# Altium PCB Logic_Controller_REV1.PcbDoc (part 1 of 2)
Units mm, origin at the board's own origin, x right, y up, seen from the top; angles counter-clockwise.
Board outline 67.13 x 101.6 mm, 4 copper layers (Top Layer, GND, PWR, Bottom Layer), stack 1.586 mm thick; 118 components, 76 nets, 360 pads, 221 vias.
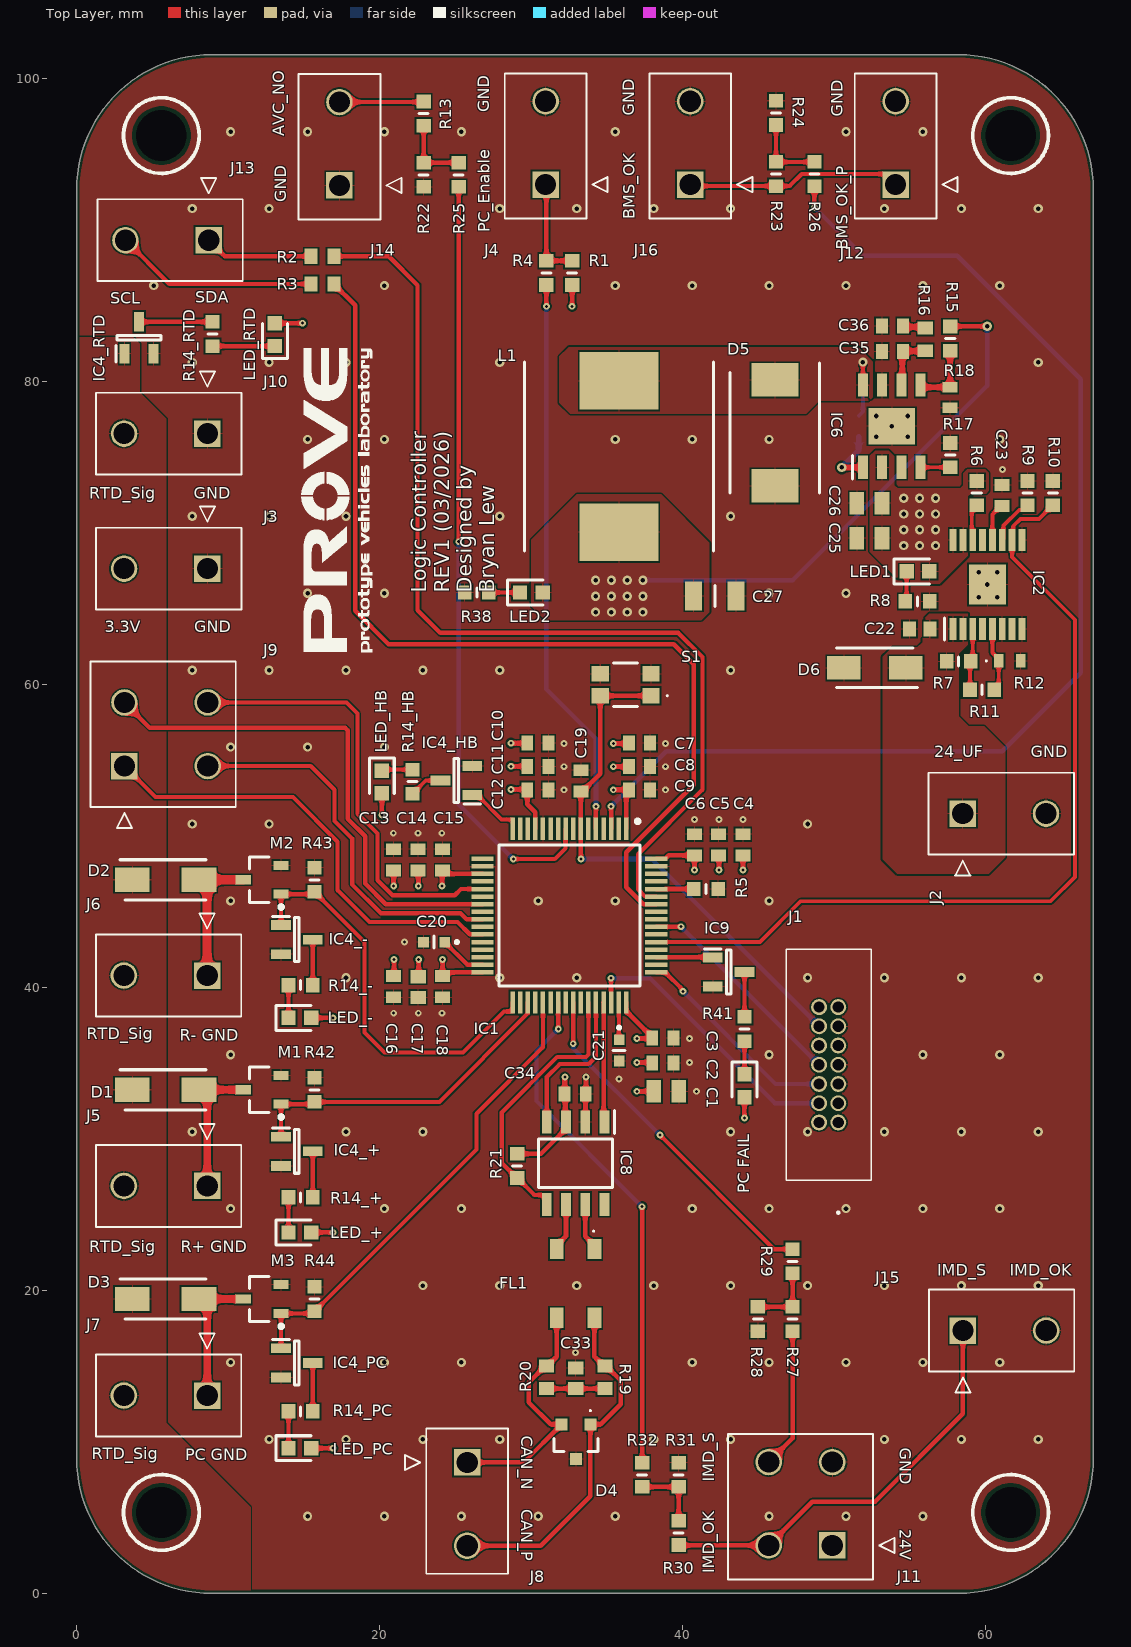
[diagram p0: Top Layer view]
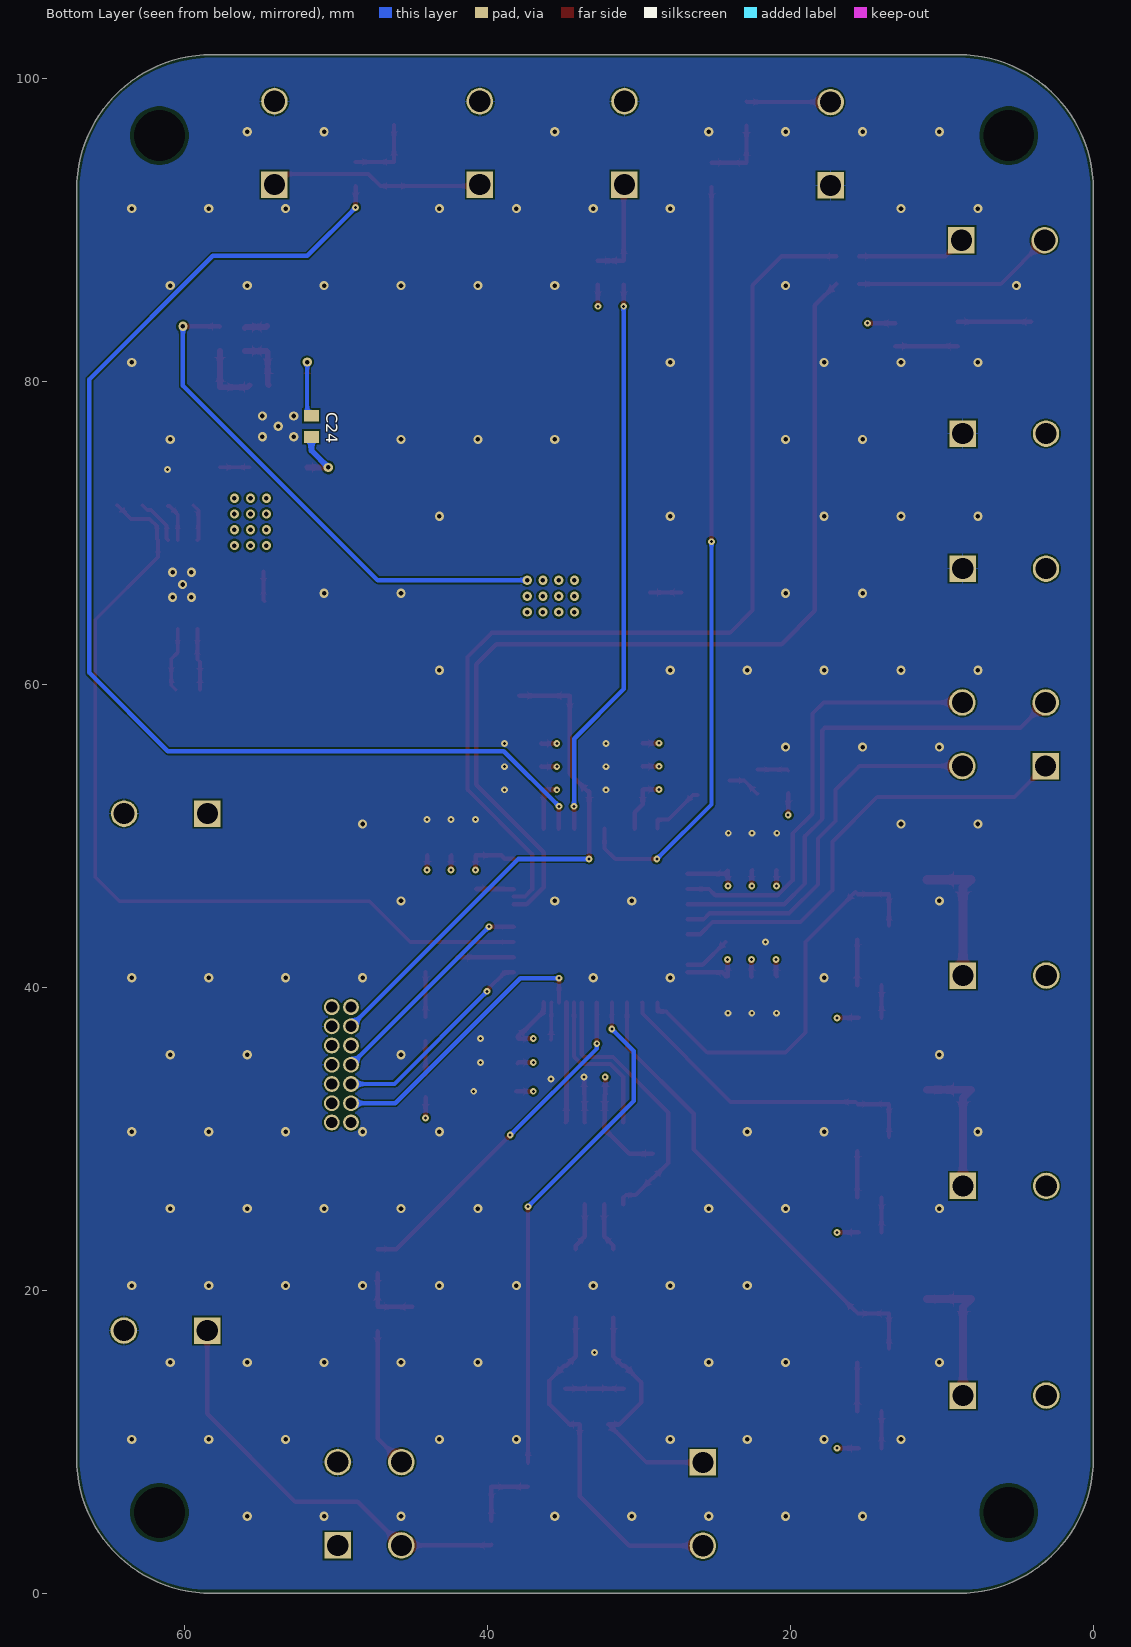
[diagram p1: Bottom Layer view, seen from below]
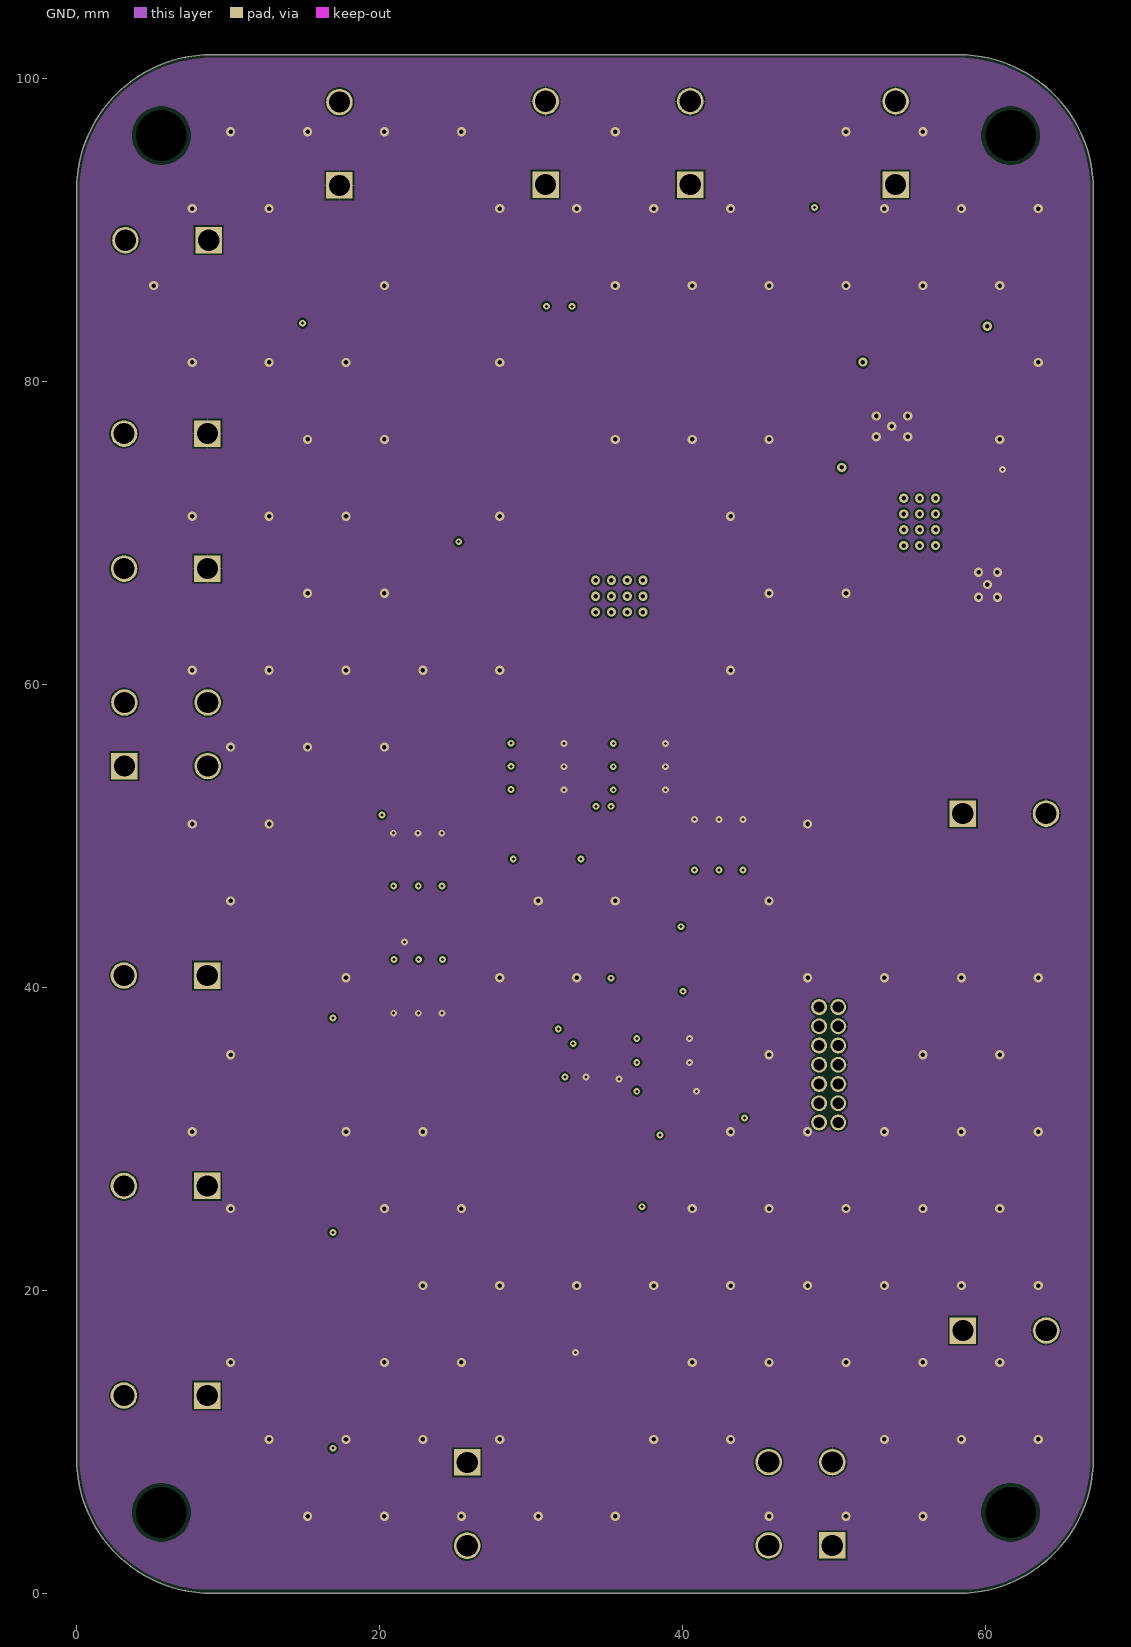
[diagram p2: GND]
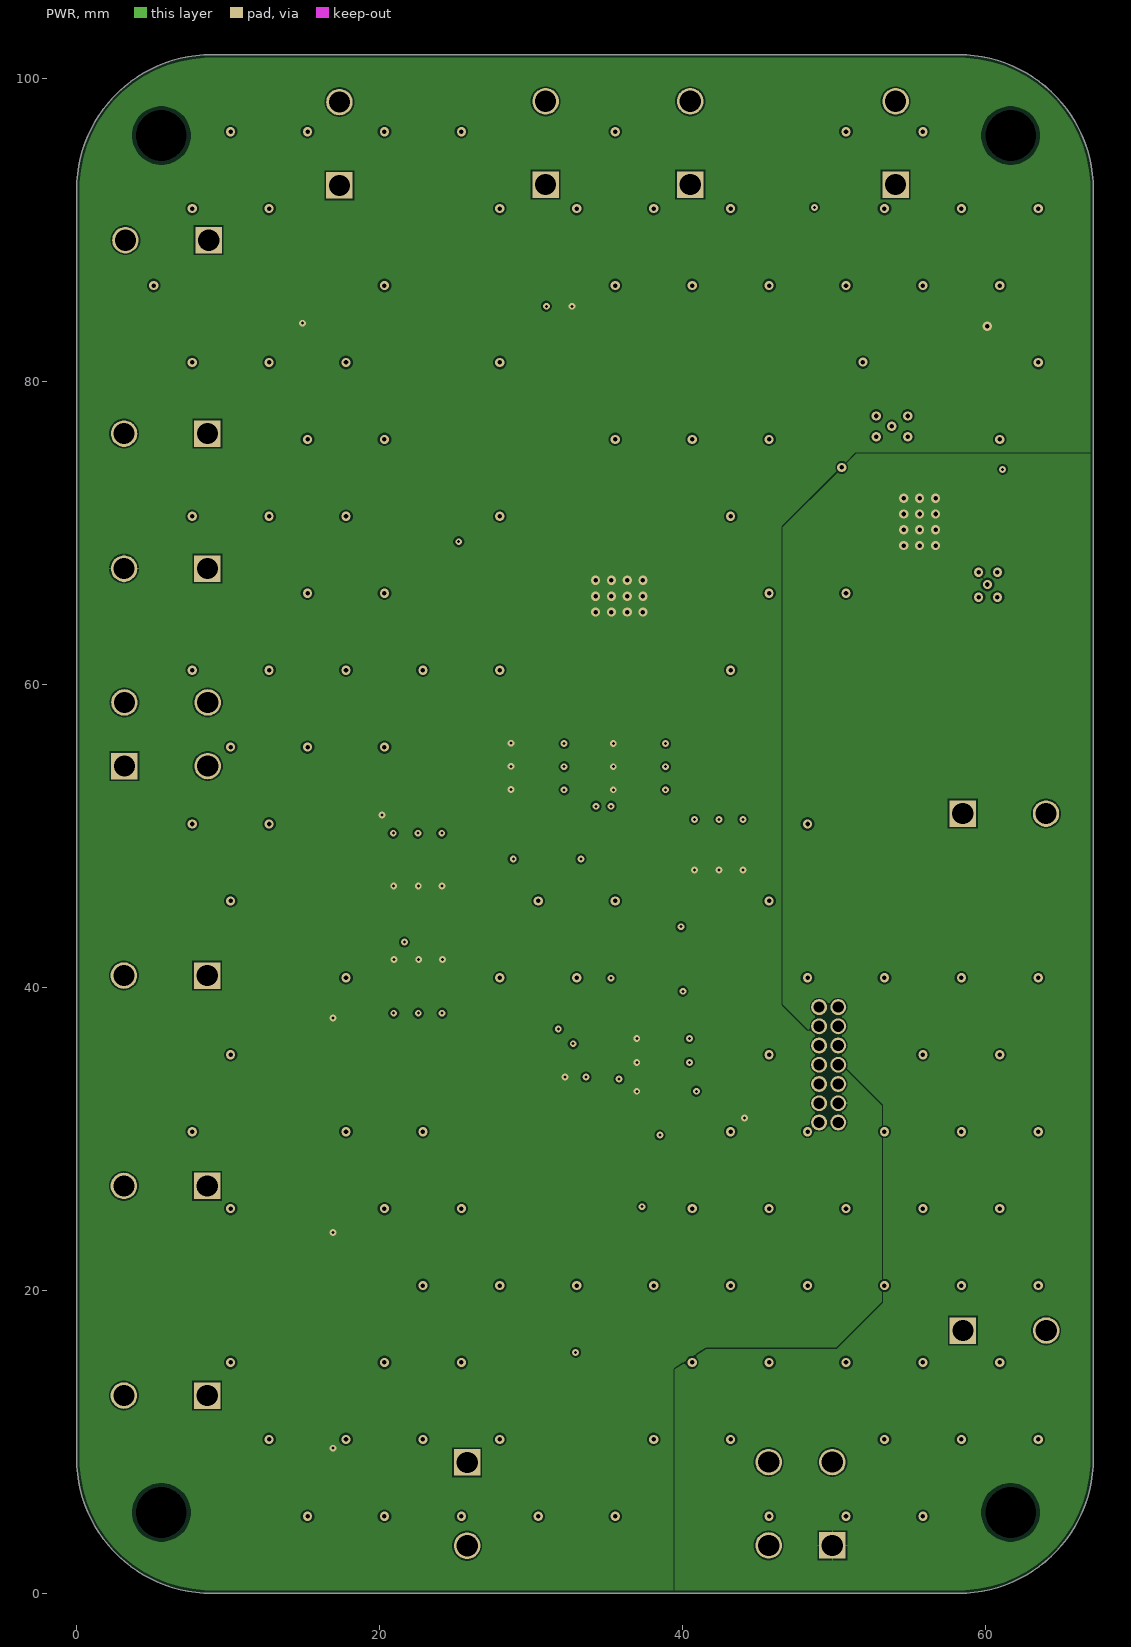
[diagram p3: PWR]
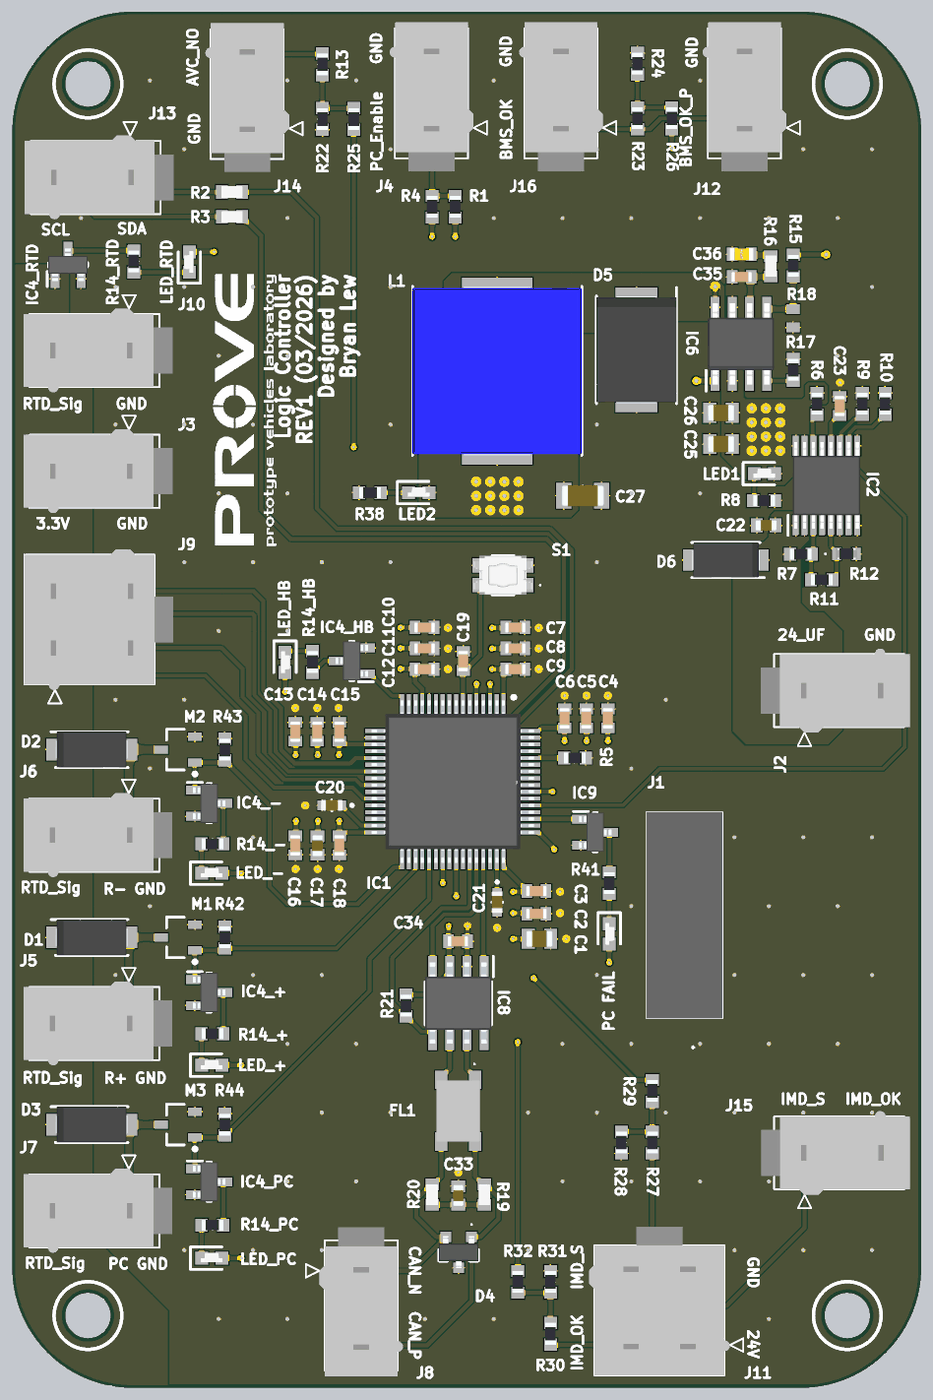
[diagram p4: 3D render of the assembled board from above, using the file's embedded part models]

## Layer stack, top to bottom
Top Solder: solder mask 0.0102, Solder Resist, Dk 3.5
Top Layer: signal copper 0.035
Dielectric 2: prepreg 0.2104, PP-006, Dk 4.1
GND: signal copper 0.0152
Dielectric 1: dielectric 1.065, FR-4, Dk 4.3
PWR: signal copper 0.0152
Dielectric 3: prepreg 0.2104, PP-006, Dk 4.1
Bottom Layer: signal copper 0.035
Bottom Solder: solder mask 0.0102, Solder Resist, Dk 3.5

## Board outline
0,8.89 0,92.71 cw(c8.89,92.71) 8.89,101.6 58.242,101.6 cw(c58.242,92.71) 67.132,92.71 67.132,8.89 cw(c58.242,8.89) 58.242,0 8.89,0 cw(c8.89,8.89)

## Design rules (kind name [scope] priority, off if disabled: settings)
BoardOutlineClearance [All] p1: gap=0.2 ignorepadtopadclearanceinfootprint=FALSE
Clearance [All] p1: gap=0.102 ignorepadtopadclearanceinfootprint=FALSE except(0.127: Arc-Via Track-Via SMDPad-Via THPad-Via Via-Via Via-Fill Via-Poly Via-Region Via-Text; 0.15: Arc-Arc Arc-Track Track-Track; 0.25: Arc-Hole Track-Hole SMDPad-Hole THPad-Hole Via-Hole Fill-Hole Poly-Hole Region-Hole Text-Hole)
ComponentClearance [All] p1: gap=0.102 collisioncheckmode=3 verticalgap=0.102 showdistances=TRUE
DiffPairsRouting [All] p1: maxlimit=0.102 minlimit=0.102 mostfreqgap=0.102 toplayer_minwidth=0.102 toplayer_maxwidth=1816.048 toplayer_prefwidth=0.102 midlayer1_minwidth=0.102 midlayer1_maxwidth=1816.048 midlayer1_prefwidth=0.102 midlayer2_minwidth=0.102 midlayer2_maxwidth=1816.048 midlayer2_prefwidth=0.102 bottomlayer_minwidth=0.102 bottomlayer_maxwidth=1816.048 bottomlayer_prefwidth=0.102 maxuncoupledlength=12.7
Height [All] p1: minheight=0 maxheight=1816.048 prefheight=12.7
HoleSize [All] p1: absolutevalues=TRUE maxlimit=6.3 minlimit=0.2 maxpercent=80.000 minpercent=20.000
HoleToHoleClearance [All] p1: gap=0.25 allowstackedmicrovias=FALSE
MinimumAnnularRing [All] p1: minimumring=0.076
MinimumSolderMaskSliver [All] p1: minsoldermaskwidth=0
PlaneClearance [All] p1: clearance=0.102
PlaneConnect PlaneConnectPowerPads [InPadClass('PowerPads')] p1: planeconnectstyle=Direct reliefexpansion=0.508 reliefentries=4 reliefconductorwidth=0.254 reliefairgap=0.254
PlaneConnect [All] p2: pad.planeconnectstyle=Relief pad.reliefexpansion=0.3 pad.reliefentries=4 pad.reliefconductorwidth=0.102 pad.reliefairgap=0.102 via.planeconnectstyle=Direct via.reliefexpansion=0.3 via.reliefentries=4 via.reliefconductorwidth=0.127 via.reliefairgap=0.127
PolygonConnect PolygonConnectPowerPads [All vs (InPadClass('PowerPads'))] p1: connectstyle=Direct reliefconductorwidth=0.254 reliefentries=4 polygonreliefangle="90 Angle" airgapwidth=0.254
PolygonConnect [All] p2: thpad.connectstyle=Relief thpad.reliefconductorwidth=0.102 thpad.reliefentries=4 thpad.polygonreliefangle="90 Angle" thpad.airgapwidth=0.102 smdpad.connectstyle=Relief smdpad.reliefconductorwidth=0.102 smdpad.reliefentries=4 smdpad.polygonreliefangle="90 Angle" smdpad.airgapwidth=0.102 via.connectstyle=Direct via.reliefconductorwidth=0.127 via.reliefentries=4 via.polygonreliefangle="90 Angle" via.airgapwidth=0.127
RoutingVias [All] p1: holewidth=0.2 width=0.45 viastyle="Through Hole" minholewidth=0.2 minwidth=0.45 maxholewidth=6.3 maxwidth=6.55
SilkToSilkClearance [All] p1: silktosilkclearance=0
SilkToSolderMaskClearance [IsPad] p1: minsilkscreentomaskgap=0.102 clearancetoexposedcopper=TRUE
SolderMaskExpansion [All] p1: expansion=0.075 istentingtop=FALSE
SupplyNets "Schematic Supply Nets" [InNet('GND')] p1: voltage=0.000
Width [All] p1: maxlimit=1816.048 minlimit=0.102 preferedwidth=0.102
20 further rules are at their usual default settings.

## Classes and differential pairs
component class "STM32 Input Conditioning": R13 R22 R23 R24 R25 R26 R27 R28 R29 R30 R31 R32
differential pair class diffc1: CANC
differential pair class diffc: CAN CANC
component class PC_Fail: IC9 "PC FAIL" R41
component class +: IC4_+ LED_+ R14_+
component class -: IC4_- LED_- R14_-
component class CAN: C33 C34 D4 FL1 IC8 R19 R20 R21
polygon class PowerPolygons: SL_READY_L02_P028
channel class LED_Driver: + - HB PC RTD_Sig_In
component class "24V to 3.3V Buck": C24 C25 C26 C27 C35 C36 D5 IC6 L1 LED2 R15 R16 R17 R18 R38
component class PC: IC4_PC LED_PC R14_PC
component class HB: IC4_HB LED_HB R14_HB
component class RTD_Sig_In: IC4_RTD LED_RTD R14_RTD
component class STM32: C1 C2 C3 C4 C5 C6 C7 C8 C9 C10 C11 C12 C13 C14 C15 C16 C17 C18 C19 C20 C21 IC1 R1 R2 R3 R4 R5 S1
component class "Relay Controller": D1 D2 D3 M1 M2 M3 R42 R43 R44
component class eFuse: C22 C23 D6 IC2 LED1 R6 R7 R8 R9 R10 R11 R12
component class Connectors: J1 J2 J3 J4 J5 J6 J7 J8 J9 J10 J11 J12 J13 J14 J15 J16
differential pair CANC: +CANC_P -CANC_N
differential pair CAN: +CAN_P -CAN_N

## Components (designator, comment, footprint, x,y, rotation, side; value= is the part's Value field where it differs from the comment)
C1 "4.7u" CAPC2012X145N 38.935,33.147 r0 top
C2 "100n" CAPC1608X90N 38.71,35.001 r0 top
C3 "100n" CAPC1608X90N 38.71,36.678 r0 top
C4 "100n" CAPC1608X90N 43.993,49.428 r90 top
C5 "100n" CAPC1608X90N 42.393,49.428 r90 top
C6 "100n" CAPC1608X90N 40.792,49.428 r90 top
C7 "100n" CAPC1608X90N 37.16,56.134 r0 top
C8 "100n" CAPC1608X90N 37.16,54.597 r0 top
C9 "100n" CAPC1608X90N 37.16,53.061 r0 top
C10 "100n" CAPC1608X90N 30.455,56.134 r0 top
C11 "100n" CAPC1608X90N 30.455,54.597 r0 top
C12 "100n" CAPC1608X90N 30.455,53.061 r0 top
C13 "100n" CAPC1608X90N 20.904,48.438 r90 top
C14 "100n" CAPC1608X90N 22.53,48.438 r90 top
C15 "100n" CAPC1608X90N 24.155,48.438 r90 top
C16 "100n" CAPC1608X90N 20.904,40.055 r270 top
C17 "1u" CAPC1608X95N 22.545,40.03 r270 top
C18 "100n" CAPC1608X90N 24.155,40.055 r270 top
C19 "100n" CAPC1608X90N 33.299,53.656 r90 top
C20 "2.2u" MBASx168 23.597,43.002 r180 top
C21 "2.2u" MBASx168 35.814,35.851 r270 top
C22 "1u" CAPC1608X95N 55.677,63.678 r180 top
C23 "100n" CAPC1608X90N 61.112,72.492 r90 top
C24 "100n" CAPC1608X90N 51.638,77.064 r90 bottom
C25 "4.7u" CAPC2012X145N 52.349,69.672 r180 top
C26 "4.7u" CAPC2012X145N 52.349,71.984 r180 top
C27 "100u" CAPC3216X190N 42.139,65.862 r0 top
C33 "4.7n" CAPC1608X95N 32.944,14.199 r90 top
C34 "100n" CAPC1608X90N 32.918,32.969 r0 top
C35 "18p" CAPC1608X90N 53.873,82.017 r180 top
C36 "22n" CAPC1608X87N 53.873,83.693 r180 top
D1 "RGF1M-E3_67A" DIOM5426X300N 5.867,33.249 r0 top
D2 "RGF1M-E3_67A" DIOM5426X300N 5.867,47.117 r0 top
D3 "RGF1M-E3_67A" DIOM5426X300N 5.867,19.431 r0 top
D4 "SM24CANB-02HTG" SM24CANB02HTG 32.969,10.008 r180 top
D5 "B560C-13-F" DIOM7959X250N 46.102,76.634 r270 top
D6 "SMAJ26A" DIOM5026X229N 52.705,61.112 r180 top
FL1 "ACT45B-510-2P-TL003" ACT45B1012PTL003 32.938,20.458 r270 top
IC1 "STM32F405RGT7" QFP50P1200X1200X160-64N 32.537,44.755 r270 top
IC2 "TPS26600PWPR" SOP65P640X120-17N 60.142,66.616 r90 top
IC4_+ "DMN61D8LQ-13" SOT96P240X110-3N 14.537,29.185 r0 top (schematic designator IC4)
IC4_- "DMN61D8LQ-13" SOT96P240X110-3N 14.537,43.16 r0 top (schematic designator IC4)
IC4_HB "DMN61D8LQ-13" SOT96P240X110-3N 25.07,53.67 r180 top (schematic designator IC4)
IC4_PC "DMN61D8LQ-13" SOT96P240X110-3N 14.537,15.215 r0 top (schematic designator IC4)
IC4_RTD "DMN61D8LQ-13" SOT96P240X110-3N 4.115,82.912 r90 top (schematic designator IC4)
IC6 "TPS54560BQDDARQ1" SOIC127P600X170-9N 53.823,77.069 r90 top
IC8 "TCAN337GD" SOIC127P600X175-8N 32.944,28.397 r270 top
IC9 "DMN61D8LQ-13" SOT96P240X110-3N 43.053,41.021 r0 top
J1 "SHF-107-01-L-D-TH" SHF10701LDTH 50.292,31.09 r90 top
J2 "39-28-1023" 39-28-1023 58.508,51.486 r90 top
J3 "39-28-1023" 39-28-1023 8.624,67.666 r270 top
J4 "39-28-1023" 39-28-1023 30.963,93.027 r180 top
J5 "39-28-1023" 39-28-1023 8.611,26.899 r270 top
J6 "39-28-1023" 39-28-1023 8.611,40.792 r270 top
J7 "39-28-1023" 39-28-1023 8.611,13.056 r270 top
J8 "39-28-1023" 39-28-1023 25.781,8.636 r0 top
J9 "39-28-1043" 39-28-1043 3.148,54.626 r90 top
J10 "39-28-1023" 39-28-1023 8.624,76.581 r270 top
J11 "39-28-1043" 39-28-1043 49.895,3.16 r180 top
J12 "39-28-1023" 39-28-1023 54.077,93.027 r180 top
J13 "39-28-1023" 39-28-1023 8.712,89.357 r270 top
J14 "39-28-1023" 39-28-1023 17.348,92.976 r180 top
J15 "39-28-1023" 39-28-1023 58.522,17.348 r90 top
J16 "39-28-1023" 39-28-1023 40.513,93.027 r180 top
L1 "18uH" INDPM125125X800N 35.814,75.07 r270 top
LED1 "150060GS75000" LEDC1608X70N 55.549,67.488 r0 top
LED2 "150060GS75000" LEDC1608X70N 30.023,66.091 r0 top
LED_+ "150060VS75000" LEDC1608X70N 14.732,23.825 r0 top (schematic designator LED)
LED_- "150060VS75000" LEDC1608X70N 14.732,37.998 r0 top (schematic designator LED)
LED_HB "150060VS75000" LEDC1608X70N 20.142,53.569 r270 top (schematic designator LED)
LED_PC "150060VS75000" LEDC1608X70N 14.732,9.576 r0 top (schematic designator LED)
LED_RTD "150060VS75000" LEDC1608X70N 13.081,83.115 r90 top (schematic designator LED)
M1 "ZXMS6004FF-7" SOT95P240X100-3N 12.243,33.249 r180 top
M2 "ZXMS6004FF-7" SOT95P240X100-3N 12.243,47.117 r180 top
M3 "ZXMS6004FF-7" SOT95P240X100-3N 12.243,19.431 r180 top
"PC FAIL" "Red, 2V, 140°" LEDC1608X70N 44.094,33.515 r270 top
R1 "10k" RESC1608X55N 32.715,87.198 r270 top
R2 "33" RESC1608X50N 16.231,88.29 r0 top
R3 "33" RESC1608X50N 16.231,86.462 r0 top
R4 "1k" RESC1608X55N 31.013,87.198 r270 top
R5 "100k" RESC1608X55N 41.554,46.507 r0 top
R6 "100k" RESC1608X55N 59.436,72.652 r270 top
R7 "715k" RESC1608X55N 58.242,61.544 r0 top
R8 "1k" RESC1608X55N 55.524,65.507 r0 top
R9 "5.36k" RESC1608X55N 62.786,72.652 r90 top
R10 "18.7k" RESC1608X55N 64.465,72.652 r90 top
R11 "20.5k" RESC1608X55N 59.792,59.665 r0 top
R12 "30.1k" ERJH3 61.614,61.569 r0 top
R13 "27k" RESC1608X55N 22.911,97.714 r90 top
R14_+ "100" RESC1608X55N 14.783,26.142 r0 top (schematic designator R14)
R14_- "100" RESC1608X55N 14.783,40.157 r0 top (schematic designator R14)
R14_HB "100" RESC1608X55N 22.174,53.594 r270 top (schematic designator R14)
R14_PC "100" RESC1608X55N 14.783,12.014 r0 top (schematic designator R14)
R14_RTD "100" RESC1608X55N 8.966,83.16 r90 top (schematic designator R14)
R15 "36.5k" RESC1608X55N 57.683,82.855 r270 top
R16 "12.4k" RESC1608X50N 56.032,82.804 r90 top
R17 "383k" RESC1608X55N 57.683,75.159 r90 top
R18 "11.7k" CAPC1608X55N 57.663,78.969 r270 top
R19 "60.4" RESC1608X50N 34.874,14.263 r270 top
R20 "60.4" RESC1608X50N 31.013,14.263 r270 top
R21 "10k" RESC1608X55N 29.083,28.219 r90 top
R22 "10k" RESC1608X55N 22.911,93.675 r90 top
R23 "68k" RESC1608X55N 46.177,93.726 r270 top
R24 "10k" RESC1608X55N 46.177,97.765 r270 top
R25 "1k" RESC1608X55N 25.222,93.675 r270 top
R26 "1k" RESC1608X55N 48.717,93.726 r270 top
R27 "68k" RESC1608X55N 47.269,18.11 r270 top
R28 "10k" RESC1608X55N 44.983,18.11 r90 top
R29 "1k" RESC1608X55N 47.269,21.92 r90 top
R30 "68k" RESC1608X55N 39.751,3.988 r270 top
R31 "10k" RESC1608X55N 39.751,7.823 r270 top
R32 "1k" RESC1608X55N 37.338,7.823 r90 top
R38 "1k" RESC1608X55N 26.416,66.091 r180 top
R41 "100" RESC1608X55N 44.094,37.262 r90 top
R42 "100k" RESC1608X55N 15.697,33.249 r90 top
R43 "100k" RESC1608X55N 15.697,47.117 r90 top
R44 "100k" RESC1608X55N 15.697,19.431 r90 top
S1 "TL1030AF350AQJ" TL1030AF350AQJ 36.246,59.995 r180 top

## Footprints (in the part's own frame and the unit in brackets; to place one, negate y for a bottom-side part, rotate by r counter-clockwise, add the part's x,y. Pads: shape width x height; smd on the part's side, far side on the other; paste and mask are expansions set on the pad)
39-28-1023 [mm]
  rect 1.75x1.75 hole 1.4: 1(0,0)
  round 1.75 hole 1.4: 2(0,-5.5)
  silkscreen extent -4.1,-7.35 2.7,2.25, body extent -3.11,-7.79 3.09,3.21, height 12.62
39-28-1043 [mm]
  rect 1.75x1.75 hole 1.4: 1(0,0)
  round 1.75 hole 1.4: 2(4.2,0) 3(0,-5.5) 4(4.2,-5.5)
  silkscreen extent -4.1,-7.35 6.9,2.25, body extent -3.11,-8.74 7.29,2.26, height 12.76
ACT45B1012PTL003 [mm]
  rect 1.35x0.9 smd: 1(-2.275,1.25) 2(-2.275,-1.25) 3(2.275,-1.25) 4(2.275,1.25)
  silkscreen extent -3.5,1.15 -3.4,1.25, body extent -2.22,-1.6 2.28,1.6, height 2.8
CAPC1608X55N [mm]
  rect 0.71x0.99 smd: 1(-0.68,0) 2(0.68,0)
  body extent 0,0 0,0
CAPC1608X87N [mm]
  rect 0.78x0.98 smd: 1(-0.7,0) 2(0.7,0)
  body extent -0.87,-0.48 0.88,0.47, height 0.87
CAPC1608X90N [mm]
  rect 0.78x0.99 smd: 1(-0.7,0) 2(0.7,0)
  body extent -0.76,-0.38 0.76,0.38, height 0.91
CAPC1608X95N [mm]
  rect 0.87x1.02 smd: 1(-0.68,0) 2(0.68,0)
  body extent -0.8,-0.4 0.8,0.4, height 0.95
CAPC2012X145N [mm]
  rect 0.97x1.47 smd: 1(-0.83,0) 2(0.83,0)
  body extent -1,-0.63 1,0.63, height 1.45
CAPC3216X190N [mm]
  rect 1.12x1.92 smd: 1(-1.4,0) 2(1.4,0)
  silkscreen extent 0,-0.7 0,0.7, body extent -1.6,-0.8 1.6,0.8, height 1.9
DIOM5026X229N [mm]
  rect 2.2x1.55 smd: 1(-2.05,0) 2(2.05,0)
  silkscreen extent -2.82,-1.3 2.52,1.3, body extent -2.52,-1.3 2.52,1.3, height 2.29
DIOM5426X300N [mm]
  rect 2.3x1.6 smd: 1(-2.2,0) 2(2.2,0)
  silkscreen extent -3,-1.32 2.68,1.32, body extent -2.68,-1.32 2.68,1.32, height 3
DIOM7959X250N [mm]
  rect 2.2x3.1 smd: 1(-3.5,0) 2(3.5,0)
  silkscreen extent -4.6,-2.95 3.97,2.95, body extent -3.97,-2.95 3.97,2.95, height 2.5
ERJH3 [mm]
  rect 0.65x0.9 smd: 1(-0.725,0) 2(0.725,0)
  silkscreen extent -1.6,-0.05 -1.5,0.05, body extent -0.8,-0.4 0.8,0.4, height 0.55
INDPM125125X800N [mm]
  rect 3.8x5.2 smd: 1(-5,0) 2(5,0)
  silkscreen extent -6.25,-6.25 6.25,6.25, body extent -6.25,-6.25 6.25,6.25, height 8
LEDC1608X70N [mm]
  rect 0.95x0.95 smd: 1(-0.75,0) 2(0.75,0)
  silkscreen extent -1.58,-0.82 0.75,0.82, body extent -0.8,-0.3 0.8,0.4, height 0.4
MBASx168 [mm]
  rect 0.7x0.7 smd: 1(-0.7,0) 2(0.7,0)
  silkscreen extent -1.6,-0.4 0,0.4, body extent -0.8,-0.4 0.8,0.4, height 0.8
QFP50P1200X1200X160-64N [mm]
  rect 1.475x0.3 smd: 1(-5.738,3.75) 2(-5.738,3.25) 3(-5.738,2.75) 4(-5.738,2.25) 5(-5.738,1.75) 6(-5.738,1.25) 7(-5.738,0.75) 8(-5.738,0.25) 9(-5.738,-0.25) 10(-5.738,-0.75) 11(-5.738,-1.25) 12(-5.738,-1.75) 13(-5.738,-2.25) 14(-5.738,-2.75) 15(-5.738,-3.25) 16(-5.738,-3.75) 33(5.738,-3.75) 34(5.738,-3.25) 35(5.738,-2.75) 36(5.738,-2.25) 37(5.738,-1.75) 38(5.738,-1.25) 39(5.738,-0.75) 40(5.738,-0.25) 41(5.738,0.25) 42(5.738,0.75) 43(5.738,1.25) 44(5.738,1.75) 45(5.738,2.25) 46(5.738,2.75) 47(5.738,3.25) 48(5.738,3.75)
  rect 0.3x1.475 smd: 17(-3.75,-5.738) 18(-3.25,-5.738) 19(-2.75,-5.738) 20(-2.25,-5.738) 21(-1.75,-5.738) 22(-1.25,-5.738) 23(-0.75,-5.738) 24(-0.25,-5.738) 25(0.25,-5.738) 26(0.75,-5.738) 27(1.25,-5.738) 28(1.75,-5.738) 29(2.25,-5.738) 30(2.75,-5.738) 31(3.25,-5.738) 32(3.75,-5.738) 49(3.75,5.738) 50(3.25,5.738) 51(2.75,5.738) 52(2.25,5.738) 53(1.75,5.738) 54(1.25,5.738) 55(0.75,5.738) 56(0.25,5.738) 57(-0.25,5.738) 58(-0.75,5.738) 59(-1.25,5.738) 60(-1.75,5.738) 61(-2.25,5.738) 62(-2.75,5.738) 63(-3.25,5.738) 64(-3.75,5.738)
  silkscreen extent -6.35,-4.65 4.65,4.65, body extent -6,-6 6,6, height 1.6
RESC1608X50N [mm]
  rect 0.85x1 smd: 1(-0.75,0) 2(0.75,0)
  body extent -0.77,-0.43 0.78,0.42, height 0.45
RESC1608X55N [mm]
  rect 0.9x0.95 smd: 1(-0.8,0) 2(0.8,0)
  silkscreen extent 0,-0.3 0,0.3, body extent -0.8,-0.4 0.8,0.4, height 0.55
SHF10701LDTH [mm]
  round 1.05 hole 0.74: 1(0,0) 2(0,1.27) 3(1.27,0) 4(1.27,1.27) 5(2.54,0) 6(2.54,1.27) 7(3.81,0) 8(3.81,1.27) 9(5.08,0) 10(5.08,1.27) 11(6.35,0) 12(6.35,1.27) 13(7.62,0) 14(7.62,1.27)
  silkscreen extent -6,-2.16 11.43,3.43, body extent -3.81,-2.16 11.43,3.43, height 5.43
SM24CANB02HTG [mm]
  rect 0.78x0.78 smd: 1(-0.95,-1.145) 2(0.95,-1.145) 3(0,1.145)
  silkscreen extent -1.46,-2.1 1.46,0.65, body extent -1.46,-1.18 1.46,1.18, height 1.12
SOIC127P600X170-9N [mm]
  rect 1.525x0.65 smd: 1(-2.712,1.905) 2(-2.712,0.635) 3(-2.712,-0.635) 4(-2.712,-1.905) 5(2.712,-1.905) 6(2.712,-0.635) 7(2.712,0.635) 8(2.712,1.905)
  rect 2.4x3.1 smd: 9(0,0)
  silkscreen extent -3.47,2.58 -1.95,2.58, body extent -3,-2.45 3,2.45, height 1.57
SOIC127P600X175-8N [mm]
  rect 1.525x0.65 smd: 1(-2.712,1.905) 2(-2.712,0.635) 3(-2.712,-0.635) 4(-2.712,-1.905) 5(2.712,-1.905) 6(2.712,-0.635) 7(2.712,0.635) 8(2.712,1.905)
  silkscreen extent -3.48,-2.45 1.6,2.58, body extent -3,-2.45 3,2.45, height 1.75
SOP65P640X120-17N [mm]
  rect 1.475x0.45 smd: 1(-2.938,2.275) 2(-2.938,1.625) 3(-2.938,0.975) 4(-2.938,0.325) 5(-2.938,-0.325) 6(-2.938,-0.975) 7(-2.938,-1.625) 8(-2.938,-2.275) 9(2.938,-2.275) 10(2.938,-1.625) 11(2.938,-0.975) 12(2.938,-0.325) 13(2.938,0.325) 14(2.938,0.975) 15(2.938,1.625) 16(2.938,2.275)
  rect 2.66x2.46 smd: 17(0,0)
  silkscreen extent -3.68,2.85 -2.2,2.85, body extent -3.2,-2.5 3.2,2.5, height 1.13
SOT95P240X100-3N [mm] "SOT23, 3-Leads, Body 2.90x2.40mm, Pitch 0.95mm, IPC Medium Density"
  rect 1x0.6 smd: 1(-1.25,0.95) 2(-1.25,-0.95) 3(1.25,0)
  silkscreen extent -1.38,-1.5 0.85,1.92, body extent -0.85,-1.5 0.85,1.5, height 1
SOT96P240X110-3N [mm]
  rect 1.3x0.65 smd: 1(-1.05,0.96) 2(-1.05,-0.96) 3(1.05,0)
  silkscreen extent -1.6,-1.45 0.15,1.54, body extent -1.2,-1.45 1.2,1.45, height 1.1
TL1030AF350AQJ [mm]
  rect 1.15x1.05 smd: 1(-1.675,0.725) 2(-1.675,-0.725) 3(1.675,0.725) 4(1.675,-0.725)
  silkscreen extent -2.8,-1.45 0.8,1.45, body extent -2.16,-1.45 2.16,1.45, height 1.71

## Part data
C1 C25 C26: library part GRM21BR61H475ME51L, "Capacitor", Manufacturer_Name="Murata Electronics", Mouser Part Number=81-GRM21BR61H475M51L, Arrow Part Number=GRM21BR61H475ME51L, Arrow Price/Stock=https://www.arrow.com/en/products/grm21br61h475me51l/murata-manufacturing?region=nac, Datasheet Link=https://search.murata.co.jp/Ceramy/image/img/A01X/G101/ENG/GRM21BR61H475ME51-01A.pdf, Height=1.45mm, Manufacturer_Part_Number=GRM21BR61H475ME51L, Mouser Price/Stock=https://www.mouser.co.uk/ProductDetail/Murata-Electronics/GRM21BR61H475ME51L?qs=eeBpzGFlv%252B%2Fg0wAeHy0eJw%3D%3D
C2 C3 C4 C5 C6 C7 C8 C9 C10 C11 C12 C13 C14 C15 C16 C18 C19 C23 C24 C34: library part 06035C104J4Z2A, "Capacitor", Manufacturer_Name="Kyocera AVX", Mouser Part Number=581-06035C104J4Z2A, Arrow Part Number=06035C104J4Z2A, Arrow Price/Stock=https://www.arrow.com/en/products/06035c104j4z2a/avx, Datasheet Link=https://componentsearchengine.com/Datasheets/1/06031A100FAT2A.pdf, Height=0.9mm, Manufacturer_Part_Number=06035C104J4Z2A, Mouser Price/Stock=https://www.mouser.co.uk/ProductDetail/KYOCERA-AVX/06035C104J4Z2A?qs=Awwwc1gvTnlncvTGCFZvkw%3D%3D
C17 C22: library part UMK107AB7105KA-T, "Capacitor", Manufacturer_Name="TAIYO YUDEN", Mouser Part Number=963-UMK107AB7105KA-T, Arrow Part Number=UMK107AB7105KA-T, Arrow Price/Stock=https://www.arrow.com/en/products/umk107ab7105ka-t/taiyo-yuden?utm_currency=USD&region=nac, Datasheet Link=https://ds.yuden.co.jp/TYCOMPAS/or/detail?pn=UMK107AB7105KA-T&u=M, Height=0.95mm, Manufacturer_Part_Number=UMK107AB7105KA-T, Mouser Price/Stock=https://www.mouser.co.uk/ProductDetail/TAIYO-YUDEN/UMK107AB7105KA-T?qs=%252BAZVS4b%2FkgKLk%2FvFAZMoRQ%3D%3D
C20 C21: library part MBASL168SB5225KTNA01, "Capacitor", Manufacturer_Name="TAIYO YUDEN", Datasheet Link=https://ds.yuden.co.jp/TYCOMPAS/or/detail?pn=MBASL168SB5225KTNA01, Height=0.8mm, Manufacturer_Part_Number=MBASL168SB5225KTNA01
C27: library part CL31X107MQKNNWE, "Capacitor", Manufacturer_Name=SAMSUNG, Mouser Part Number=187-CL31X107MQKNNWE, Datasheet Link=https://www.digikey.sg/en/products/detail/samsung-electro-mechanics/CL31X107MQKNNWE/25854287?srsltid=AfmBOoqYZ52GRQ9Xlh8bi0lGOe-KtDJ1wz9-WyaigKcCVSEueXc8l4on, Height=1.9mm, Manufacturer_Part_Number=CL31X107MQKNNWE, Mouser Price/Stock=https://www.mouser.co.uk/ProductDetail/Samsung-Electro-Mechanics/CL31X107MQKNNWE?qs=Jm2GQyTW%2FbjTv%252BH%2F%252BndEuA%3D%3D
C33: library part 0603B472M500CT, "Capacitor", Manufacturer_Name="Walsin Technology Corporation", Datasheet Link=https://www.passivecomponent.com/wp-content/uploads/datasheet/WTC_MLCC_General_Purpose.pdf, Height=0.95mm, Manufacturer_Part_Number=0603B472M500CT
C35: library part 06035A180JAT4A, "Capacitor", Manufacturer_Name="Kyocera AVX", Mouser Part Number=581-06035A180JAT4A, Datasheet Link=https://componentsearchengine.com/Datasheets/1/06031A100FAT2A.pdf, Height=0.9mm, Manufacturer_Part_Number=06035A180JAT4A, Mouser Price/Stock=https://www.mouser.co.uk/ProductDetail/AVX/06035A180JAT4A?qs=GMfvKSOiCGHkuDR8fcucAQ%3D%3D
C36: library part C0603C223K5RAC-TU, "Capacitor", Manufacturer_Name=KEMET, Datasheet Link=https://www.kemet.com/specsheet/C0603C223K5RACTU, Height=0.87mm, Manufacturer_Part_Number=C0603C223K5RAC-TU
D1 D2 D3: "Diode", Arrow Part Number=RGF1M-E3/67A, Manufacturer_Name=Vishay, Mouser Part Number=625-RGF1M-E3, Arrow Price/Stock=https://www.arrow.com/en/products/rgf1m-e367a/vishay?region=nac, Datasheet Link=https://www.vishay.com/docs/88697/rgf1.pdf, Height=3mm, Manufacturer_Part_Number=RGF1M-E3/67A, Mouser Price/Stock=https://www.mouser.co.uk/ProductDetail/Vishay-General-Semiconductor/RGF1M-E3-67A?qs=4xyK702%2F%252BQ1dl%252BTCdyIThg%3D%3D
D4: "TVS Diode (Bi-directional)", Manufacturer_Name=LITTELFUSE, Mouser Part Number=576-SM24CANB-02HTG, Arrow Part Number=SM24CANB-02HTG, Arrow Price/Stock=https://www.arrow.com/en/products/sm24canb-02htg/littelfuse?utm_currency=USD&region=nac, Datasheet Link=https://www.littelfuse.com/products/overvoltage-protection/tvs-diode-arrays/general-purpose/sm24canb/sm24canb-02htg, Height=1.12mm, Manufacturer_Part_Number=SM24CANB-02HTG, Mouser Price/Stock=https://www.mouser.co.uk/ProductDetail/Littelfuse/SM24CANB-02HTG?qs=bWsWnctWn1wbKmCYlcUmHw%3D%3D
D5: "Diode", Manufacturer_Name="Diodes Incorporated", Mouser Part Number=621-B560C-F, Arrow Part Number=B560C-13-F, Arrow Price/Stock=https://www.arrow.com/en/products/b560c-13-f/diodes-incorporated?utm_currency=USD&region=nac, Datasheet Link=https://datasheet.lcsc.com/szlcsc/Diodes-Incorporated-B560C-13-F_C85100.pdf, Height=2.5mm, Manufacturer_Part_Number=B560C-13-F, Mouser Price/Stock=https://www.mouser.co.uk/ProductDetail/Diodes-Incorporated/B560C-13-F?qs=OC0R%252Bhozcm%252BAsjMXklZLIw%3D%3D
D6: "TVS Diode (Uni-directional)", Manufacturer_Name=LITTELFUSE, Mouser Part Number=576-SMAJ26A, Arrow Part Number=SMAJ26A, Arrow Price/Stock=https://www.arrow.com/en/products/smaj26a/littelfuse?region=nac, Datasheet Link=https://www.littelfuse.com/~/media/electronics/datasheets/tvs_diodes/littelfuse_tvs_diode_smaj_datasheet.pdf.pdf, Height=2.29mm, Manufacturer_Part_Number=SMAJ26A, Mouser Price/Stock=https://www.mouser.co.uk/ProductDetail/Littelfuse/SMAJ26A?qs=HR2RnyOI4E5UFOxZR4oQ3w%3D%3D
FL1: "Filter", Manufacturer_Name=TDK, Mouser Part Number=810-ACT45B5102PTL003, Arrow Part Number=ACT45B-510-2P-TL003, Arrow Price/Stock=https://www.arrow.com/en/products/act45b-510-2p-tl003/tdk?utm_currency=USD&region=nac, Datasheet Link=https://product.tdk.com/system/files/dam/doc/product/emc/emc/cmf_cmc/catalog/cmf_automotive_signal_act45b_en.pdf, Height=3mm, Manufacturer_Part_Number=ACT45B-510-2P-TL003, Mouser Price/Stock=https://www.mouser.co.uk/ProductDetail/TDK/ACT45B-510-2P-TL003?qs=U1cgCdF9Le9LCroNYLqljw%3D%3D
IC1: "Integrated Circuit", Manufacturer_Name=STMicroelectronics, Mouser Part Number=511-STM32F405RGT7, Arrow Part Number=STM32F405RGT7, Arrow Price/Stock=https://www.arrow.com/en/products/stm32f405rgt7/stmicroelectronics?utm_currency=USD&region=nac, Datasheet Link=https://www.st.com/content/ccc/resource/technical/document/datasheet/ef/92/76/6d/bb/c2/4f/f7/DM00037051.pdf/files/DM00037051.pdf/jcr:content/translations/en.DM00037051.pdf, Height=1.6mm, Manufacturer_Part_Number=STM32F405RGT7, Mouser Price/Stock=https://www.mouser.co.uk/ProductDetail/STMicroelectronics/STM32F405RGT7?qs=DqCdCwOw4%2F6rAq3yUvY8rA%3D%3D
IC2: "Integrated Circuit", Manufacturer_Name="Texas Instruments", Mouser Part Number=595-TPS26600PWPR, Arrow Part Number=TPS26600PWPR, Arrow Price/Stock=https://www.arrow.com/en/products/tps26600pwpr/texas-instruments?region=nac, Datasheet Link=http://www.ti.com/lit/gpn/tps2660, Height=1.2mm, Manufacturer_Part_Number=TPS26600PWPR, Mouser Price/Stock=https://www.mouser.co.uk/ProductDetail/Texas-Instruments/TPS26600PWPR?qs=Bho%2FbeBaDExFVQBFO8fB%2FQ%3D%3D
IC4_+ IC4_- IC4_HB IC4_PC IC4_RTD IC9: "Integrated Circuit", Manufacturer_Name="Diodes Incorporated", Mouser Part Number=621-DMN61D8LQ-13, Arrow Part Number=DMN61D8LQ-13, Arrow Price/Stock=https://www.arrow.com/en/products/dmn61d8lq-13/diodes-incorporated?utm_currency=USD&region=nac, Datasheet Link=https://www.diodes.com//assets/Datasheets/DMN61D8LQ.pdf, Height=1.1mm, Manufacturer_Part_Number=DMN61D8LQ-13, Mouser Price/Stock=https://www.mouser.co.uk/ProductDetail/Diodes-Incorporated/DMN61D8LQ-13?qs=DBvH5xl4UymJgoulTjiNCg%3D%3D
IC6: "Integrated Circuit", Manufacturer_Name="Texas Instruments", Mouser Part Number=595-TPS54560BQDDARQ1, Arrow Part Number=TPS54560BQDDARQ1, Arrow Price/Stock=https://www.arrow.com/en/products/tps54560bqddarq1/texas-instruments?utm_currency=USD&region=nac, Datasheet Link=http://www.ti.com/lit/gpn/tps54560b-q1, Height=1.7mm, Manufacturer_Part_Number=TPS54560BQDDARQ1, Mouser Price/Stock=https://www.mouser.co.uk/ProductDetail/Texas-Instruments/TPS54560BQDDARQ1?qs=Mv7BduZupUi0AsDfghsxzg%3D%3D
IC8: "Integrated Circuit", Manufacturer_Name="Texas Instruments", Mouser Part Number=595-TCAN337GD, Arrow Part Number=TCAN337GD, Arrow Price/Stock=https://www.arrow.com/en/products/tcan337gd/texas-instruments?region=europe, Datasheet Link=https://www.arrow.com/en/products/tcan337gd/texas-instruments, Height=1.75mm, Manufacturer_Part_Number=TCAN337GD, Mouser Price/Stock=https://www.mouser.co.uk/ProductDetail/Texas-Instruments/TCAN337GD?qs=gMfM3zrbS4qmjQESf%252BTgJw%3D%3D
J1: "Connector", Manufacturer_Name=SAMTEC, Mouser Part Number=200-SHF10701LDTH, Arrow Part Number=SHF-107-01-L-D-TH, Arrow Price/Stock=https://www.arrow.com/en/products/shf-107-01-l-d-th/samtec?utm_currency=USD&region=nac, Datasheet Link=https://componentsearchengine.com/Datasheets/1/SHF-107-01-L-D-TH.pdf, Height=5.33mm, Manufacturer_Part_Number=SHF-107-01-L-D-TH, Mouser Price/Stock=https://www.mouser.co.uk/ProductDetail/Samtec/SHF-107-01-L-D-TH?qs=%252BZP6%2F%252BtExtDrbekpOnhfag%3D%3D
J2 J3 J4 J5 J6 J7 J8 J10 J12 J13 J14 J15 J16: "Connector", Manufacturer_Name=Molex, Mouser Part Number=538-39-28-1023, Arrow Part Number=39-28-1023, Arrow Price/Stock=https://www.arrow.com/en/products/39-28-1023/molex?region=nac, Datasheet Link=https://www.molex.com/pdm_docs/sd/039281023_sd.pdf, Height=12.8mm, Manufacturer_Part_Number=39-28-1023, Mouser Price/Stock=https://www.mouser.co.uk/ProductDetail/Molex/39-28-1023?qs=LQQHZ4xw2XBykFU0jRHvlQ%3D%3D
J9 J11: "Connector", Manufacturer_Name=Molex, Mouser Part Number=538-39-28-1043, Arrow Part Number=39-28-1043, Arrow Price/Stock=https://www.arrow.com/en/products/39-28-1043/molex?region=nac, Datasheet Link=https://www.molex.com/pdm_docs/sd/039281023_sd.pdf, Height=12.8mm, Manufacturer_Part_Number=39-28-1043, Mouser Price/Stock=https://www.mouser.co.uk/ProductDetail/Molex/39-28-1043?qs=LQQHZ4xw2XCMHoV0KRLGhg%3D%3D
L1: library part SRR1280-180M, "Inductor", Manufacturer_Name=Bourns, Mouser Part Number=652-SRR1280-180M, Arrow Part Number=SRR1280-180M, Arrow Price/Stock=https://www.arrow.com/en/products/srr1280-180m/bourns?region=nac, Datasheet Link=https://www.bourns.com/docs/Product-Datasheets/SRR1280.pdf, Height=8mm, Manufacturer_Part_Number=SRR1280-180M, Mouser Price/Stock=https://www.mouser.co.uk/ProductDetail/Bourns/SRR1280-180M?qs=brMhP%2FMjUfeRcSm%2FRxSrFQ%3D%3D
LED1 LED2: "LED", Manufacturer_Name="Wurth Elektronik", Mouser Part Number=710-150060GS75000, Datasheet Link=https://www.we-online.com/catalog/datasheet/150060GS75000.pdf, Height=0.7mm, Manufacturer_Part_Number=150060GS75000, Mouser Price/Stock=https://www.mouser.co.uk/ProductDetail/Wurth-Elektronik/150060GS75000?qs=LlUlMxKIyB0UYkq5lDO8nA%3D%3D
LED_+ LED_- LED_HB LED_PC LED_RTD: "LED", Manufacturer_Name="Wurth Elektronik", Mouser Part Number=710-150060VS75000, Datasheet Link=https://www.we-online.com/catalog/datasheet/150060VS75000.pdf, Height=0.7mm, Manufacturer_Part_Number=150060VS75000, Mouser Price/Stock=https://www.mouser.co.uk/ProductDetail/Wurth-Elektronik/150060VS75000?qs=LlUlMxKIyB1Q1Bi5mQ%2FKLw%3D%3D
"PC FAIL": library part 150060RS75000, "LED", Manufacturer_Name="Wurth Elektronik", Mouser Part Number=710-150060RS75000, Datasheet Link=https://www.we-online.com/catalog/datasheet/150060RS75000.pdf, Height=0.7mm, Manufacturer_Part_Number=150060RS75000, Mouser Price/Stock=https://www.mouser.co.uk/ProductDetail/Wurth-Elektronik/150060RS75000?qs=LlUlMxKIyB3QnmZ3fw%2FVCA%3D%3D
R1 R21 R22 R24 R28 R31: library part CRGCQ0603F10K, "Resistor", Manufacturer_Name="TE Connectivity", Mouser Part Number=279-CRGCQ0603F10K, Arrow Part Number=CRGCQ0603F10K, Arrow Price/Stock=https://www.arrow.com/en/products/crgcq0603f10k/te-connectivity?region=nac, Datasheet Link=https://www.te.com/commerce/DocumentDelivery/DDEController?Action=showdoc&DocId=Data+Sheet%7F1773204-3%7F1%7Fpdf%7FEnglish%7FENG_DS_1773204-3_1.pdf%7F5-2176339-2, Height=0.55mm, Manufacturer_Part_Number=CRGCQ0603F10K, Mouser Price/Stock=https://www.mouser.co.uk/ProductDetail/TE-Connectivity-Holsworthy/CRGCQ0603F10K?qs=wUXugUrL1qxhM765MzQWJg%3D%3D
R2 R3: library part CRCW060333R0JNEC, "Resistor", Manufacturer_Name=Vishay, Mouser Part Number=71-CRCW060333R0JNEC, Arrow Part Number=CRCW060333R0JNEC, Arrow Price/Stock=https://www.arrow.com/en/products/crcw060333r0jnec/vishay?region=nac, Datasheet Link=http://www.vishay.com/docs/20035/dcrcwe3.pdf, Height=0.5mm, Manufacturer_Part_Number=CRCW060333R0JNEC, Mouser Price/Stock=https://www.mouser.co.uk/ProductDetail/Vishay-Dale/CRCW060333R0JNEC?qs=ZO1m%252BzWAUg2kwAG1IfiiMA%3D%3D
R4 R8 R25 R26 R29 R32 R38: library part RMCF0603JT1K00, "Resistor", Manufacturer_Name="Stackpole Electronics", Mouser Part Number=708-RMCF0603JT1K00, Arrow Part Number=RMCF0603JT1K00, Arrow Price/Stock=https://www.arrow.com/en/products/rmcf0603jt1k00/stackpole-electronics?region=nac, Datasheet Link=https://www.seielect.com/Catalog/SEI-RMCF_RMCP.pdf, Height=0.55mm, Manufacturer_Part_Number=RMCF0603JT1K00, Mouser Price/Stock=https://www.mouser.co.uk/ProductDetail/SEI-Stackpole/RMCF0603JT1K00?qs=FESYatJ8odK3lrUeqnFxyg%3D%3D
R5 R6 R42 R43 R44: library part CR0603-JW-104ELF, "Resistor", Manufacturer_Name=Bourns, Mouser Part Number=652-CR0603-JW-104ELF, Arrow Part Number=CR0603-JW-104ELF, Arrow Price/Stock=https://www.arrow.com/en/products/cr0603-jw-104elf/bourns?region=nac, Datasheet Link=https://www.bourns.com/pdfs/chpreztr.pdf, Height=0.55mm, Manufacturer_Part_Number=CR0603-JW-104ELF, Mouser Price/Stock=https://www.mouser.co.uk/ProductDetail/Bourns/CR0603-JW-104ELF?qs=wOX%252BDVkMoZSK2gq9cFrtRg%3D%3D
R7: library part ERJ-3RED7153V, "Resistor", Manufacturer_Name=Panasonic, Mouser Part Number=667-ERJ-3RED7153V, Height=0.55mm, Manufacturer_Part_Number=ERJ-3RED7153V, Mouser Price/Stock=https://www.mouser.co.uk/ProductDetail/Panasonic/ERJ-3RED7153V?qs=KTDjhDDUMAkeRZjDK2%2FIGQ%3D%3D
R9: library part RK73H1JTTD5361F, "Resistor", Manufacturer_Name="KOA Speer", Mouser Part Number=660-RK73H1JTTD5361F, Datasheet Link=http://www.koaspeer.com/catimages/Products/RK73-RT/RK73-RT.pdf, Height=0.55mm, Manufacturer_Part_Number=RK73H1JTTD5361F, Mouser Price/Stock=http://www.mouser.com/Search/ProductDetail.aspx?qs=VsVuNjgfZhozLTQBmeIWog%3d%3d
R10: library part RMCF0603FT18K7, "Resistor", Manufacturer_Name="Stackpole Electronics", Datasheet Link=https://www.seielect.com/Catalog/SEI-RMCF_RMCP.pdf, Height=0.55mm, Manufacturer_Part_Number=RMCF0603FT18K7
R11: library part ERJ-3EKF2052V, "Resistor", Manufacturer_Name=Panasonic, Arrow Part Number=ERJ-3EKF2052V, Arrow Price/Stock=https://www.arrow.com/en/products/erj3ekf2052v/panasonic?region=nac, Datasheet Link=http://industrial.panasonic.com/cdbs/www-data/pdf/RDA0000/AOA0000C86.pdf, Height=0.55mm, Manufacturer_Part_Number=ERJ-3EKF2052V
R12: library part ERJ-H3EF3012V, "Resistor", Manufacturer_Name=Panasonic, Datasheet Link=http://industrial.panasonic.com/cdbs/www-data/pdf/RDQ0000/ast-ind-151033.pdf, Manufacturer_Part_Number=ERJ-H3EF3012V
R13: library part TNPW060327K0BEEA, "Resistor", Manufacturer_Name=Vishay, Mouser Part Number=71-TNPW060327K0BEEA, Arrow Part Number=TNPW060327K0BEEA, Arrow Price/Stock=https://www.arrow.com/en/products/tnpw060327k0beea/vishay, Datasheet Link=https://componentsearchengine.com/Datasheets/1/TNPW060327K0BEEA.pdf, Height=0.55mm, Manufacturer_Part_Number=TNPW060327K0BEEA, Mouser Price/Stock=https://www.mouser.co.uk/ProductDetail/Vishay-Dale/TNPW060327K0BEEA?qs=rhzOH%252BTaZWuJVeAMpnOOjQ%3D%3D
R14_+ R14_- R14_HB R14_PC R14_RTD R41: library part RC0603JR-7W100RL, "Resistor", Manufacturer_Name="Yageo Group", Mouser Part Number=603-RC0603JR-7W100RL, Arrow Part Number=RC0603JR-7W100RL, Arrow Price/Stock=https://www.arrow.com/en/products/rc0603jr-7w100rl/yageo?region=nac, Datasheet Link=http://www.yageo.com/documents/recent/PYu-RC0603_51_RoHS_L_v5.pdf, Height=0.55mm, Manufacturer_Part_Number=RC0603JR-7W100RL, Mouser Price/Stock=https://www.mouser.co.uk/ProductDetail/YAGEO/RC0603JR-7W100RL?qs=tggtontpCXNb6PZs9ghEpg%3D%3D
R15: library part ERJ-3EKF3652V, "Resistor", Manufacturer_Name=Panasonic, Mouser Part Number=667-ERJ-3EKF3652V, Arrow Part Number=ERJ-3EKF3652V, Arrow Price/Stock=https://www.arrow.com/en/products/erj-3ekf3652v/panasonic?region=nac, Datasheet Link=http://industrial.panasonic.com/cdbs/www-data/pdf/RDA0000/AOA0000C86.pdf, Height=0.55mm, Manufacturer_Part_Number=ERJ-3EKF3652V, Mouser Price/Stock=https://www.mouser.co.uk/ProductDetail/Panasonic/ERJ-3EKF3652V?qs=MVjVSMjNRMrgC1BnfDObyw%3D%3D
R16: library part CRCW060312K4FKEA, "Resistor", Manufacturer_Name=Vishay, Mouser Part Number=71-CRCW0603-12.4K-E3, Arrow Part Number=CRCW060312K4FKEA, Arrow Price/Stock=https://www.arrow.com/en/products/crcw060312k4fkea/vishay?utm_currency=USD&region=nac, Datasheet Link=http://www.vishay.com/docs/20035/dcrcwe3.pdf, Height=0.5mm, Manufacturer_Part_Number=CRCW060312K4FKEA, Mouser Price/Stock=https://www.mouser.co.uk/ProductDetail/Vishay-Dale/CRCW060312K4FKEA?qs=8tsW7z%2Fc78of4VB3wUPkkg%3D%3D
R17: library part ERJ-3EKF3833V, "Resistor", Manufacturer_Name=Panasonic, Mouser Part Number=667-ERJ-3EKF3833V, Arrow Part Number=ERJ-3EKF3833V, Arrow Price/Stock=https://www.arrow.com/en/products/erj-3ekf3833v/panasonic, Datasheet Link=http://industrial.panasonic.com/cdbs/www-data/pdf/RDA0000/AOA0000C86.pdf, Height=0.55mm, Manufacturer_Part_Number=ERJ-3EKF3833V, Mouser Price/Stock=https://www.mouser.com/Search/Refine.aspx?Keyword=667-ERJ-3EKF3833V
R18: library part TNPW060311K7BEEA, "Resistor", Manufacturer_Name=Vishay, Mouser Part Number=71-TNPW060311K7BEEA, Datasheet Link=https://componentsearchengine.com/Datasheets/1/TNPW060311K7BEEA.pdf, Height=0.55mm, Manufacturer_Part_Number=TNPW060311K7BEEA, Mouser Price/Stock=https://www.mouser.co.uk/ProductDetail/Vishay-Dale/TNPW060311K7BEEA?qs=ixLl9tGHk8sqv6nzL7A%252BsQ%3D%3D
R19 R20: library part CRCW060360R4FKEA, "Resistor", Manufacturer_Name=Vishay, Mouser Part Number=71-CRCW0603-60.4-E3, Arrow Part Number=CRCW060360R4FKEA, Arrow Price/Stock=https://www.arrow.com/en/products/crcw060360r4fkea/vishay, Datasheet Link=http://www.vishay.com/docs/20035/dcrcwe3.pdf, Height=0.5mm, Manufacturer_Part_Number=CRCW060360R4FKEA, Mouser Price/Stock=https://www.mouser.co.uk/ProductDetail/Vishay-Dale/CRCW060360R4FKEA?qs=6fyMJ9%2FiJ9KMVX8MBWVfDg%3D%3D
R23 R27 R30: library part MCT06030D6802BP500, "Resistor", Manufacturer_Name=Vishay, Datasheet Link=http://www.vishay.com/docs/28705/mcx0x0xpro.pdf, Height=0.55mm, Manufacturer_Part_Number=MCT06030D6802BP500
S1: "Switch", Manufacturer_Name=E-Switch, Mouser Part Number=612-TL1030AF350AQJ, Datasheet Link=https://configured-product-images.s3.amazonaws.com/2D/specs/TL1030AF350AQJ.pdf, Height=1.95mm, Manufacturer_Part_Number=TL1030AF350AQJ, Mouser Price/Stock=https://www.mouser.co.uk/ProductDetail/E-Switch/TL1030AF350AQJ?qs=VVKQmw408U%2FgalG8VZqjEg%3D%3D

## Free pads (board coordinates)
  round 1.524 hole 3.35 unplated: 1(5.588,5.334) 1(5.588,96.266) 1(61.671,5.334) 1(61.671,96.266)

## Via types
v1: diameter 0.61, hole 0.3, Top Layer to Bottom Layer, tented both sides, 121 vias
v2: diameter 0.45, hole 0.2, Top Layer to Bottom Layer, 63 vias
v3: diameter 0.61, hole 0.3, Top Layer to Bottom Layer, 37 vias

## Nets (pads, with @x,y where several pads share a name; then routed paths per layer and width w, separated by ;. In a path a pad name is that pad's centre, name@x,y a point inside that pad or via, vN(x,y) a via of type N, cw(c..) or ccw(c..) an arc to the next point about the centre after c; other vN are vias at no path point)
3.3V: "PC FAIL.2" C1.1 C2.1 C3.1 C4.1 C5.1 C6.1 C7.1 C8.1 C9.1 C10.1 C11.1 C12.1 C13.1 C14.1 C15.1 C16.1 C17.1 C18.1 C27.1 C34.1 IC1.1 IC1.13 IC1.19 IC1.32 IC1.48 IC1.64 IC8.3 J1.3 J3.2 L1.2 LED2.2 LED_+.2 LED_-.2 LED_HB.2 LED_PC.2 LED_RTD.2 R1.2 R15.1 R21.2 | length 88
  Top Layer w0.3: LED_RTD.2@13.087,83.871 v2(14.91,83.871) ; LED_PC.2 v2(16.916,9.576) ; LED_+.2 v2(16.916,23.825) ; LED_-.2 v2(16.916,37.998) ; LED_HB.2 20.151,52.81 v2(20.151,51.384) ; C16.1 20.955,40.806 v2(20.955,41.859) ; C13.1 20.93,47.712 v2(20.93,46.711) ; C14.1 22.555,47.712 v2(22.555,46.711) ; C17.1 22.581,40.746 v2(22.581,41.859) ; v2(24.13,46.711) C15.1@24.13,47.712 ; v2(24.155,41.859) C18.1 24.26,40.755 24.51,41.005 IC1.32 ; IC1.19 C15.1@24.338,47.505 ; v2(28.677,53.086) 29.729,53.086 C12.1 29.755,52.116 30.287,51.583 IC1.13 ; v2(28.677,54.61) 29.742,54.61 C11.1 ; v2(28.677,56.134) C10.1 ; v2(32.715,84.988) R1.2 ; v2(35.433,53.061) C9.1 36.287,52.888 IC1.1 ; v2(35.433,54.585) 36.447,54.585 C8.1 ; v2(35.433,56.109) 36.435,56.109 C7.1 ; v2(36.982,33.147) C1.1 ; v2(36.982,35.052) 37.959,35.052 C2.1 ; v2(36.982,36.627) 37.959,36.627 C3.1 ; IC1.64 38.863,48.505 39.086,48.728 C6.1 v2(40.792,47.752) ; C5.1 42.418,48.703 v2(42.418,47.752) ; v2(43.993,47.752) C4.1 ; v2(44.094,31.394) 44.094,32.765 ; R15.1 57.696,83.668 v3(60.122,83.668) ; C15.1@24.13,47.712 C15.1@24.338,47.505 ; C15.1@24.13,47.712 C15.1@24.338,47.505
  Top Layer w0.305: R21.2 30.656,29.019 32.309,30.672 IC8.3 32.264,31.154 32.264,32.924 C34.1 32.225,32.976 32.225,34.08 v2(32.233,34.087) ; IC1.48 36.287,38.434 37.701,37.02 37.772,37.02 38.01,36.783 C3.1
  Bottom Layer w0.3: v3(37.389,66.904) 47.269,66.904 60.122,79.756 v3(60.122,83.668)
  other v3: 34.265,64.795 35.306,64.795 36.347,64.795 37.389,64.795 34.265,65.845 35.306,65.845 36.347,65.845 37.389,65.845 34.265,66.904 35.306,66.904 36.347,66.904
24V: C25.1 C26.1 IC2.15 IC2.16 IC6.2 J11.1 LED1.2 R6.1
  other v3: 54.61,69.19 55.66,69.19 56.718,69.19 54.61,70.231 55.66,70.231 56.718,70.231 54.61,71.272 55.66,71.272 56.718,71.272 54.61,72.314 55.66,72.314 56.718,72.314
"24V Unfused": C22.1 D6.1 IC2.1 IC2.2 J2.1 R7.1
"!FLT CAN": IC1.43 IC8.5 R21.1 | length 18.4
  Top Layer w0.279: R21.1 29.058,27.419 28.067,28.41 28.067,31.75 31.725,35.408 33.624,35.408 33.787,35.571 IC1.43 ; R21.1@29.108,27.419 30.219,26.308 30.853,26.308 31.039,26.123 IC8.5
"!FLT EF": IC2.14 R6.2 | length 2.5
  Top Layer w0.254: IC2.14 59.104,69.616 59.104,71.52 R6.2
"+ Relay GND": D1.2 J5.1 M1.3 | length 9.5
  Top Layer w0.508: J5.1 8.611,32.705 D1.2 M1.3
"+ Signal": IC1.35 IC4_+.1 M1.1 R42.1 | length 21.7
  Top Layer w0.279: IC4_+.1 13.493,30.15 M1.1 15.547,32.299 R42.1 23.948,32.449 29.777,38.278 29.777,39.007 IC1.35
"- Relay GND": D2.2 J6.1 M2.3 | length 9.5
  Top Layer w0.6: J6.1 8.611,46.617 8.111,47.117 D2.2 M2.3
"- Signal": IC1.33 IC4_-.1 M2.1 R43.1 | length 27
  Top Layer w0.279: IC4_-.1 13.493,44.125 M2.1 15.547,46.167 R43.1 15.722,46.317 16.032,46.007 16.032,45.982 18.999,43.015 18.999,37.033 20.32,35.712 25.502,35.712 28.208,38.419 28.777,38.419 28.787,38.429 IC1.33
AVC2r_NO: IC1.9 R25.2 | length 50.9
  Top Layer w0.279: v2(25.222,69.444) R25.2 ; v2(28.829,48.489) 31.572,48.489 32.277,49.194 32.277,50.483 IC1.9
  Bottom Layer w0.279: v2(25.222,69.444) 25.222,52.095 v2(28.829,48.489)
"AVC2r_NO (12V)": J14.2 R13.2 | length 5.6
  Top Layer w0.279: J14.2 22.873,98.476 R13.2
BMS_OK: IC1.3 R26.2 | length 79.2
  Top Layer w0.3: IC1.3 v2@35.287,51.966 ; v2(48.717,91.516) R26.2
  Bottom Layer w0.3: v2(35.29,51.968) 38.928,55.607 61.118,55.607 66.294,60.782 66.294,80.162 58.141,88.316 51.918,88.316 v2(48.717,91.516)
"BMS_OK (24V)": J12.1 J16.1 R23.2 | length 14.2
  Top Layer w0.279: J16.1 40.614,92.926 R23.2 47.079,92.926 47.879,93.726 53.377,93.726 J12.1
BOOT: C24.1 IC6.1 | length 3.9
  Top Layer w0.381: v3(50.521,74.346) 51.906,74.346 IC6.1
  Bottom Layer w0.381: v3(50.521,74.346) 51.638,75.463 C24.1
BOOT0: IC1.60 R5.1 | length 2.5
  Top Layer w0.3: IC1.60 38.863,46.505 38.866,46.507 R5.1
"CAN RX": IC1.44 IC8.4 | length 10.4
  Top Layer w0.279: IC8.4 31.039,34.087 31.902,34.95 33.807,34.95 34.287,35.43 IC1.44
"CAN TX": IC1.45 IC8.1 | length 7.9
  Top Layer w0.305: IC1.45 34.79,39.014 34.79,31.168 IC8.1
CAN_N: D4.2 FL1.3 J8.1 R20.1 | length 16.4
  Top Layer w0.3: J8.1 29.503,8.636 D4.2 31.291,11.153 29.845,12.598 29.845,13.919 30.938,15.013 R20.1 ; R20.1@31.088,15.013 31.688,15.613 FL1.3
CAN_P: D4.1 FL1.4 J8.2 R19.1 | length 23.3
  Top Layer w0.3: J8.2 30.644,3.136 33.919,6.411 D4.1 34.597,11.153 35.916,12.471 35.916,14.046 34.949,15.013 R19.1 34.799,15.013 34.188,15.624 FL1.4
CANC_N: FL1.2 IC8.6 | length 3.2
  Top Layer w0.3: FL1.2 31.688,22.958 FL1.2@31.988,23.258 ; FL1.2@31.99,23.258 32.309,23.577 IC8.6
CANC_P: FL1.1 IC8.7 | length 3.2
  Top Layer w0.3: IC8.7 33.579,23.568 34.188,22.958 FL1.1
COMP: C35.1 IC6.6 R16.1 | length 3.8
  Top Layer w0.381: IC6.6 54.516,79.839 54.516,81.959 C35.1 54.592,82.035 56.014,82.035 R16.1
dVdT: C23.1 IC2.12 | length 2.6
  Top Layer w0.254: IC2.12 60.467,71.251 61.007,71.792 C23.1
FB: IC6.5 R15.2 R18.1 | length 4.4
  Top Layer w0.381: IC6.5 55.86,79.649 R18.1 57.673,79.659 57.673,82.045 R15.2
GND: C1.2 C2.2 C3.2 C4.2 C5.2 C6.2 C7.2 C8.2 C9.2 C10.2 C11.2 C12.2 C13.2 C14.2 C15.2 C16.2 C17.2 C18.2 C19.2 C20.2 C21.2 C22.2 C23.2 C25.2 C26.2 C27.2 C33.2 C34.2 C35.2 C36.2 D4.3 D5.2 D6.2 IC1.12 IC1.18 IC1.63 IC2.6 IC2.8 IC2.9 IC2.17 IC4_+.2 IC4_-.2 IC4_HB.2 IC4_PC.2 IC4_RTD.2 IC6.7 IC6.9 IC8.2 IC9.2 J1.5 J1.7 J1.11 J2.2 J3.1 J4.2 J10.1 J11.3 J12.2 J14.1 J15.2 J16.2 M1.2 M2.2 M3.2 R5.2 R8.2 R9.2 R10.2 R12.2 R17.2 R18.2 R22.1 R24.1 R28.1 R31.1 R38.2 R42.2 R43.2 R44.2 S1.2 S1.4 | length 3
  Top Layer w0.279: IC8.2 33.599,31.129 33.599,32.949 C34.2 33.624,32.975 33.624,34.081 v2(33.63,34.087)
  other v1: 15.24,5.08 20.32,5.08 25.4,5.08 30.48,5.08 35.56,5.08 45.72,5.08 50.8,5.08 55.88,5.08 12.7,10.16 17.78,10.16 22.86,10.16 27.94,10.16 38.1,10.16 43.18,10.16 53.34,10.16 58.42,10.16 63.5,10.16 10.16,15.24 20.32,15.24 25.4,15.24 40.64,15.24 45.72,15.24 50.8,15.24 55.88,15.24 60.96,15.24 22.86,20.32 27.94,20.32 33.02,20.32 38.1,20.32 43.18,20.32 48.26,20.32 53.34,20.32 58.42,20.32 63.5,20.32 10.16,25.4 20.32,25.4 25.4,25.4 40.64,25.4 45.72,25.4 50.8,25.4 55.88,25.4 60.96,25.4 7.62,30.48 17.78,30.48 22.86,30.48 43.18,30.48 48.26,30.48 53.34,30.48 58.42,30.48 63.5,30.48 10.16,35.56 45.72,35.56 55.88,35.56 60.96,35.56 17.78,40.64 27.94,40.64 33.02,40.64 48.26,40.64 53.34,40.64 58.42,40.64 63.5,40.64 10.16,45.72 30.48,45.72 35.56,45.72 45.72,45.72 7.62,50.8 12.7,50.8 48.26,50.8 10.16,55.88 15.24,55.88 20.32,55.88 7.62,60.96 12.7,60.96 17.78,60.96 22.86,60.96 27.94,60.96 43.18,60.96 15.24,66.04 20.32,66.04 45.72,66.04 50.8,66.04 7.62,71.12 12.7,71.12 17.78,71.12 27.94,71.12 43.18,71.12 15.24,76.2 20.32,76.2 35.56,76.2 40.64,76.2 45.72,76.2 60.96,76.2 7.62,81.28 12.7,81.28 17.78,81.28 27.94,81.28 63.5,81.28 5.08,86.36 20.32,86.36 35.56,86.36 40.64,86.36 45.72,86.36 50.8,86.36 55.88,86.36 60.96,86.36 7.62,91.44 12.7,91.44 27.94,91.44 33.02,91.44 38.1,91.44 43.18,91.44 53.34,91.44 58.42,91.44 63.5,91.44 10.16,96.52 15.24,96.52 20.32,96.52 25.4,96.52 35.56,96.52 50.8,96.52 55.88,96.52
  other v2: 32.944,15.9 40.919,33.147 35.814,33.96 40.462,35.052 40.462,36.627 20.93,38.303 22.555,38.303 24.13,38.303 21.641,43.002 20.904,50.19 22.53,50.19 24.105,50.19 40.792,51.105 42.418,51.105 43.993,51.105 32.182,53.061 38.887,53.061 32.182,54.585 38.887,54.585 32.182,56.109 38.887,56.109 61.138,74.219
  other v3: 59.558,65.778 60.802,65.778 60.142,66.616 59.558,67.429 60.802,67.429 52.798,76.369 54.873,76.369 53.823,77.069 52.798,77.744 54.873,77.744
Heartbeat: IC1.16 IC4_HB.1 | length 3.9
  Top Layer w0.254: IC4_HB.1 26.445,52.71 28.052,51.103 28.764,51.103 28.787,51.08 IC1.16
ILI: IC2.11 R9.1 | length 3.1
  Top Layer w0.254: IC2.11 61.203,69.639 61.203,70.504 62.24,71.541 62.476,71.541 R9.1
IMD_OK: IC1.39 R32.2 | length 33.9
  Top Layer w0.279: IC1.39 31.794,39.01 31.794,37.269 v2(31.801,37.262) ; R32.2 v2(37.338,25.527)
  Bottom Layer w0.279: v2(31.801,37.262) 30.353,35.814 30.353,32.512 v2(37.338,25.527)
"IMD_OK (24V)": J11.2 J15.1 R30.2 | length 27.9
  Top Layer w0.3: R30.2 39.779,3.16 J11.2 48.58,6.045 52.719,6.045 58.522,11.848 J15.1
IMD_Status: IC1.41 R29.2 | length 23
  Top Layer w0.279: v2(32.787,36.292) IC1.41 ; v2(38.506,30.251) 46.038,22.72 R29.2
  Bottom Layer w0.279: v2(32.787,36.292) 32.787,35.971 v2(38.506,30.251)
"IMD_Status (24V)": J11.4 R27.2 | length 9.3
  Top Layer w0.3: J11.4 47.269,10.234 R27.2
IMON: IC1.53 IC2.10 R10.1 | length 57.5
  Top Layer w0.254: IC1.53 45.113,43.005 47.803,45.695 64.313,45.695 65.913,47.295 65.913,64.287 61.767,68.433 IC2.10 61.841,69.628 61.841,70.473 62.319,70.951 63.54,70.951 64.44,71.852 R10.1
NetC33_1: C33.1 R19.2 R20.2 | length 3.9
  Top Layer w0.3: R20.2 R19.2
NetC36_1: C36.1 R16.2 | length 1.5
  Top Layer w0.381: C36.1 54.643,83.624 55.963,83.624 R16.2
NetIC1_21: IC1.21 J9.4 | length 29.3
  Top Layer w0.279: J9.4 17.805,58.826 18.542,58.09 18.542,51.479 19.856,50.165 19.856,47.089 20.846,46.098 24.966,46.098 25.372,46.505 IC1.21
NetIC1_23: IC1.23 J9.2 | length 34.4
  Top Layer w0.279: J9.2 4.824,57.15 17.732,57.15 17.896,56.986 17.896,51.141 19.05,49.987 19.05,46.863 20.408,45.505 IC1.23
NetIC1_25: IC1.25 J9.3 | length 25.3
  Top Layer w0.279: J9.3 15.452,54.626 17.018,53.061 17.018,51.003 18.186,49.835 18.186,46.812 20.091,44.907 25.349,44.907 25.752,44.505 IC1.25
NetIC1_27: IC1.27 J9.1 | length 30.1
  Top Layer w0.279: J9.1 5.196,52.578 14.275,52.578 17.221,49.632 17.221,46.431 19.329,44.323 25.146,44.323 25.954,43.515 26.789,43.515 IC1.27
NetIC1_58: IC1.58 R3.2 | length 65
  Top Layer w0.305: R3.2 18.39,85.053 18.39,64.874 20.589,62.674 39.436,62.674 40.754,61.356 40.754,53.404 36.297,48.946 36.297,46.63 37.419,45.507 38.273,45.507 IC1.58
NetIC1_59: IC1.59 R2.2 | length 66.4
  Top Layer w0.279: R2.2 20.599,88.29 22.506,86.383 22.506,64.92 24.003,63.424 39.726,63.424 41.326,61.824 41.326,53.068 37.059,48.801 37.059,46.493 37.536,46.015 37.678,46.015 37.688,46.005 IC1.59
NetIC4_+_3: IC4_+.3 R14_+.2 | length 3
  Top Layer w0.279: R14_+.2 15.587,26.147 IC4_+.3
NetIC4_-_3: IC4_-.3 R14_-.2 | length 3
  Top Layer w0.279: R14_-.2 15.587,40.162 IC4_-.3
NetIC4_HB_3: IC4_HB.3 R14_HB.2 | length 2.2
  Top Layer w0.254: R14_HB.2 22.199,52.794 22.522,53.117 22.522,53.142 23.05,53.67 IC4_HB.3
NetIC4_PC_3: IC4_PC.3 R14_PC.2 | length 3.2
  Top Layer w0.279: R14_PC.2 15.587,12.019 IC4_PC.3
NetIC4_RTD_Sig_In_3: IC4_RTD.3 R14_RTD.2 | length 4.9
  Top Layer w0.3: IC4_RTD.3 8.964,83.962 R14_RTD.2
NetIC9_3: IC9.3 R41.2 | length 3
  Top Layer w0.279: R41.2 44.103,38.07 IC9.3
NetLED1_1: LED1.1 R8.1 | length 2
  Top Layer w0.254: R8.1 54.799,65.582 LED1.1
NetLED2_1: LED2.1 R38.1 | length 2.1
  Top Layer w0.279: R38.1 LED2.1
NetLED_+_1: LED_+.1 R14_+.1 | length 2.3
  Top Layer w0.279: LED_+.1 R14_+.1
NetLED_-_1: LED_-.1 R14_-.1 | length 2.2
  Top Layer w0.279: LED_-.1 R14_-.1
NetLED_HB_1: LED_HB.1 R14_HB.1 | length 2.1
  Top Layer w0.254: LED_HB.1 20.217,54.394 R14_HB.1
NetLED_PC_1: LED_PC.1 R14_PC.1 | length 2.4
  Top Layer w0.279: LED_PC.1 R14_PC.1
NetLED_RTD_Sig_In_1: LED_RTD.1 R14_RTD.1 | length 4.1
  Top Layer w0.3: R14_RTD.1 13.075,82.36 LED_RTD.1
"NetPC FAIL_1": "PC FAIL.1" R41.1 | length 2.2
  Top Layer w0.279: 44.094,34.265 R41.1
NetR13_1: R13.1 R22.2 R25.1 | length 4.8
  Top Layer w0.279: R13.1 R22.2 R25.1
NetR23_1: R23.1 R24.2 R26.1 | length 5
  Top Layer w0.279: R24.2 R23.1 R26.1
NetR27_1: R27.1 R28.2 R29.1 | length 4.5
  Top Layer w0.3: R28.2 R27.1 R29.1
NetR30_1: R30.1 R31.2 R32.1 | length 4.6
  Top Layer w0.3: R32.1 R31.2 R30.1
NRST: C19.1 IC1.7 J1.12 S1.1 S1.3 | length 35
  Top Layer w0.305: v2(33.296,48.488) 33.29,48.494 33.29,50.49 IC1.7 33.287,52.944 33.392,52.944 34.571,54.122 S1.3 S1.1
  Bottom Layer w0.305: v2(33.296,48.488) 37.974,48.488 J1.12
OVP: IC2.5 R11.2 R12.1 | length 4.2
  Top Layer w0.254: IC2.5 60.467,62.116 R12.1@60.889,61.694 ; R11.2 60.889,59.962 R12.1
"PC Signal": IC1.37 IC4_PC.1 M3.1 R44.1 | length 31.2
  Top Layer w0.279: IC4_PC.1 13.493,16.18 M3.1 15.547,18.481 R44.1 15.722,18.631 26.391,29.299 26.391,31.666 30.787,36.063 IC1.37
PC_Enable: J4.1 R1.1 R4.1 | length 6.8
  Top Layer w0.3: J4.1 31.013,92.976 R4.1 R1.1
PC_Fail: IC1.51 IC9.1 | length 3.7
  Top Layer w0.3: IC1.51 41.979,42.005 IC9.1
PCE: IC1.5 R4.2 | length 37.3
  Top Layer w0.3: v2(31.013,84.988) R4.2 ; IC1.5 34.287,51.966 v2(34.29,51.968)
  Bottom Layer w0.3: v2(31.013,84.988) 31.013,59.715 34.29,56.439 v2(34.29,51.968)
"Precharge Relay GND": D3.2 J7.1 M3.3 | length 9.5
  Top Layer w0.508: J7.1 8.611,18.888 D3.2 M3.3
RT/CLK: IC6.4 R17.1 | length 2
  Top Layer w0.254: IC6.4 R17.1 R17.1
RTD_Sig: D1.1 D2.1 D3.1 IC4_RTD.1 J5.2 J6.2 J7.2 J10.2
SCL: J13.2 R3.1 | length 13.5
  Top Layer w0.279: J13.2 6.108,86.462 R3.1
SDA: J13.1 R2.1 | length 7.2
  Top Layer w0.279: J13.1 9.779,88.29 R2.1
SW: C24.2 D5.1 IC6.8 L1.1 | length 5.2
  Top Layer w0.254: IC6.8 v3(51.918,81.305)
  Bottom Layer w0.254: C24.2 51.655,77.764 51.918,78.027 v3(51.918,81.305)
SWCLK: IC1.49 J1.6 | length 13.9
  Top Layer w0.279: IC1.49 38.863,41.005 39.998,39.87 39.998,39.784 v2(40.03,39.751)